# EAGLE board PCB0M8B1 (EAGLE 6.2)
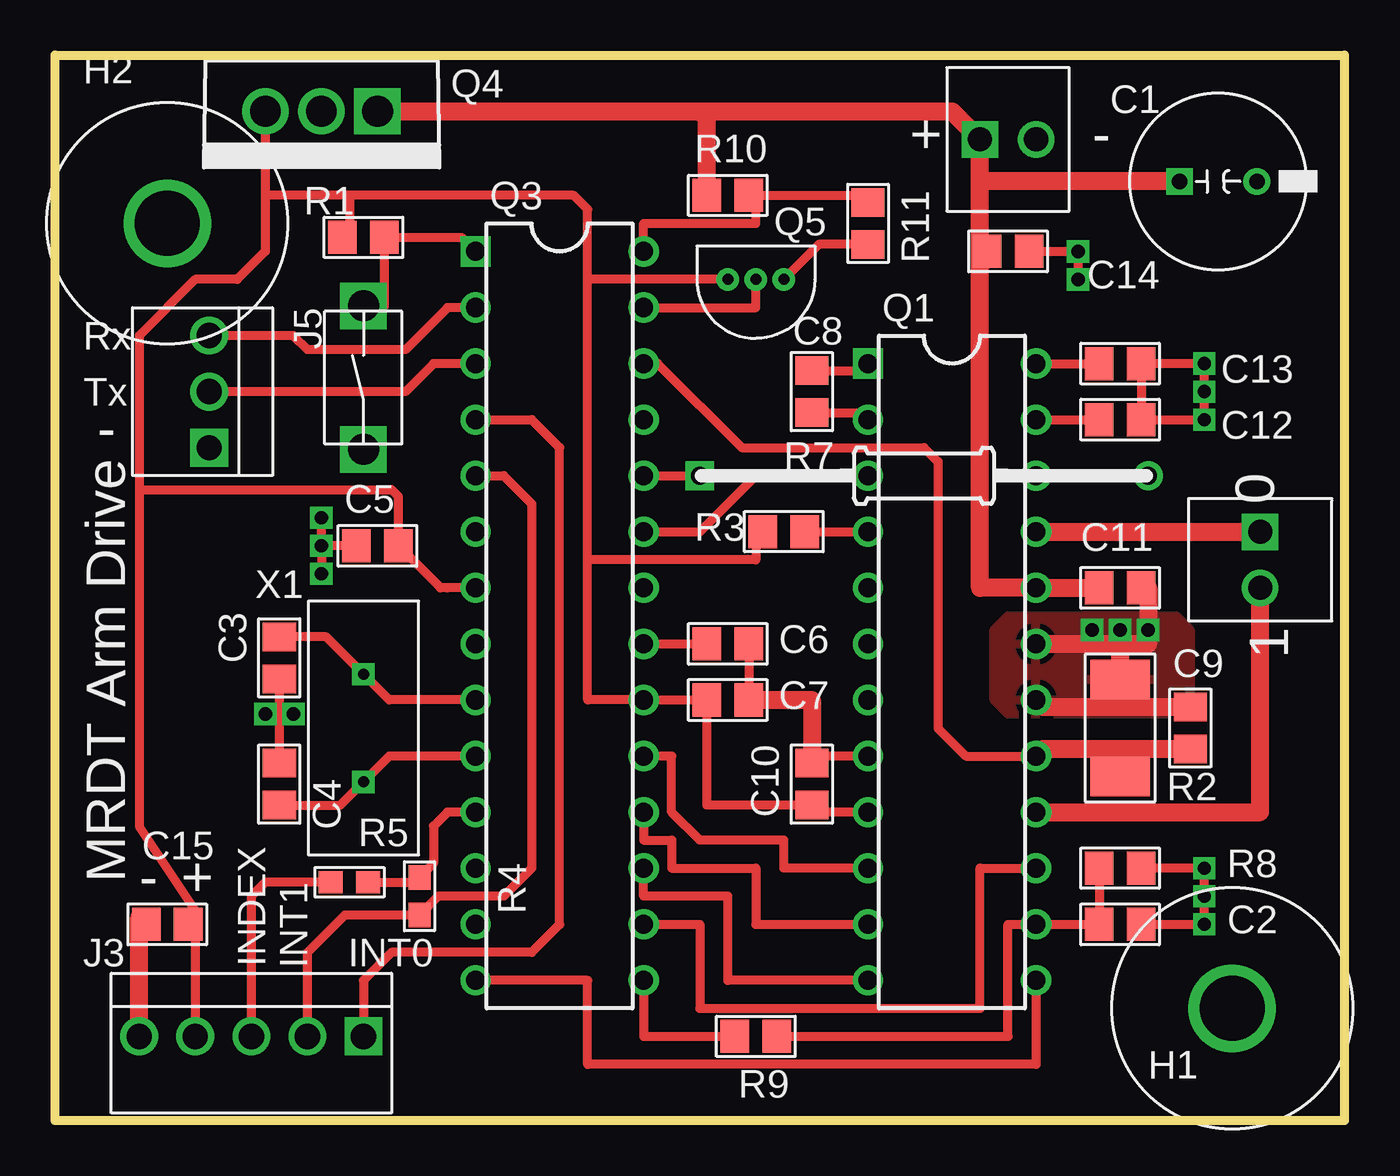
[diagram p0: board, top side]
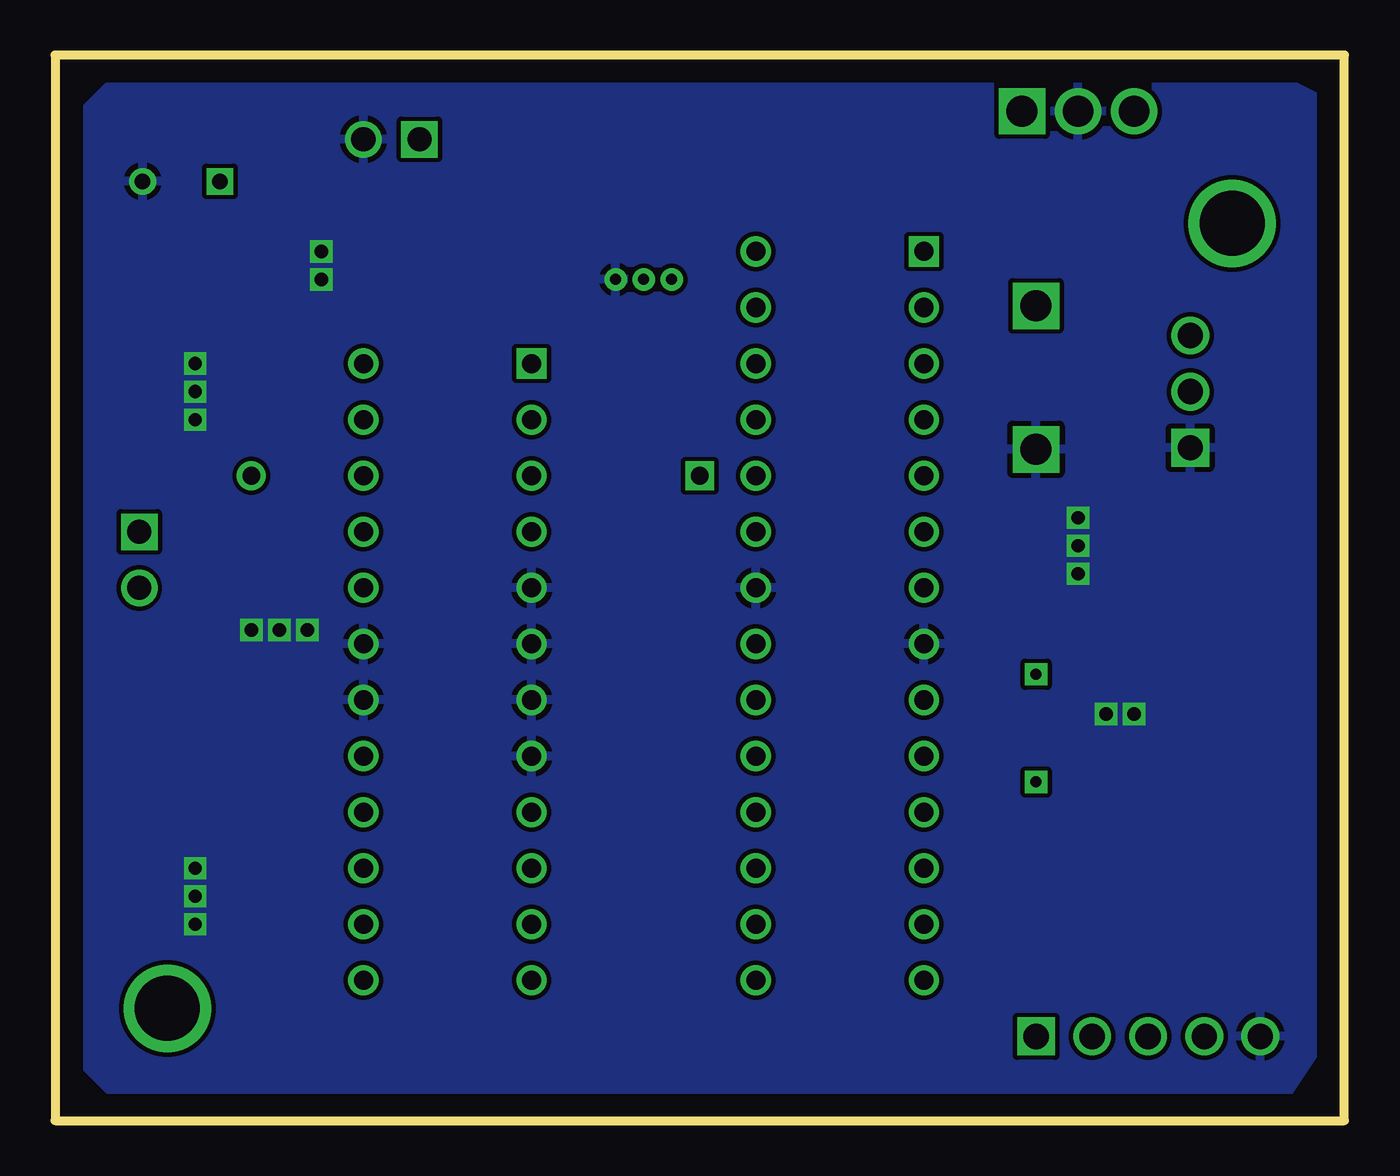
[diagram p1: board, bottom side, seen from below]

Size 58.42 x 48.26 mm. Coordinates in mm from the lower left corner, seen from the top.
Outline: 0,0 0,48.26 58.42,48.26 58.42,0 0,0
Copper layers (1*16): Top 0.035mm / dielectric 1.5mm / Bottom 0.035mm
Design rules: minimum track width 10mil, minimum drill 15mil, track to track 8mil, track to pad 8mil, pad to pad 8mil, via to via 8mil, smd to smd 8mil, copper to edge 40mil, drill to drill 8mil, minimum pad ring 10mil, minimum via ring 8mil, stop-mask expansion 4mil, vias tented up to drill 0mil, thermal gap 10mil

## Footprints (pad centres in the part's own frame; a part is rotated, then mirrored left to right if it is on the bottom)
C_8MM = drill 0.7 square: + -1.75,0 | drill 0.7: - 1.75,0
C_0805 = smd 1.3 x 1.5: 1 -0.95,0; 2 0.95,0
H_MNTHOLE_#4 = drill 2.946: 1 0,0
J_2.54MM = drill 1.1 square: P$1 -1.27,0 | drill 1.1: P$2 1.27,0
J_MTA100_5P = drill 1.143 square: 1 5.08,0 | drill 1.143: 2 2.54,0; 3 0,0; 4 -2.54,0; 5 -5.08,0
J_TOGGLE = drill 1.4 square: P$1 -3.25,0; P$2 3.25,0
J_MTA100_3P = drill 1.143 square: 1 2.54,0 | drill 1.143: 2 0,0; 3 -2.54,0
DIP24 = drill 0.864 square: 1 -16.51,-3.81 | drill 0.864: 2 -13.97,-3.81; 3 -11.43,-3.81; 4 -8.89,-3.81; 5 -6.35,-3.81; 6 -3.81,-3.81; 7 -1.27,-3.81; 8 1.27,-3.81; 9 3.81,-3.81; 10 6.35,-3.81; 11 8.89,-3.81; 12 11.43,-3.81; 13 11.43,3.81; 14 8.89,3.81; 15 6.35,3.81; 16 3.81,3.81; 17 1.27,3.81; 18 -1.27,3.81; 19 -3.81,3.81; 20 -6.35,3.81; 21 -8.89,3.81; 22 -11.43,3.81; 23 -13.97,3.81; 24 -16.51,3.81
DIP28 = drill 0.864 square: 1 -16.51,-3.81 | drill 0.864: 2 -13.97,-3.81; 3 -11.43,-3.81; 4 -8.89,-3.81; 5 -6.35,-3.81; 6 -3.81,-3.81; 7 -1.27,-3.81; 8 1.27,-3.81; 9 3.81,-3.81; 10 6.35,-3.81; 11 8.89,-3.81; 12 11.43,-3.81; 13 13.97,-3.81; 14 16.51,-3.81; 15 16.51,3.81; 16 13.97,3.81; 17 11.43,3.81; 18 8.89,3.81; 19 6.35,3.81; 20 3.81,3.81; 21 1.27,3.81; 22 -1.27,3.81; 23 -3.81,3.81; 24 -6.35,3.81; 25 -8.89,3.81; 26 -11.43,3.81; 27 -13.97,3.81; 28 -16.51,3.81
TO-220 = drill 1.397 square: 1 -2.54,0 | drill 1.397: 2 0,0; 3 2.54,0
TO-92-3 = drill 0.5: 1 1.27,0; 2 0,0; 3 -1.27,0
R_0805 = smd 1.3 x 1.5: 1 -0.95,0; 2 0.95,0
R_2010 = smd 1.8 x 2.7: 1 -2.2,0; 2 2.2,0
R_0603 = smd 1.1 x 1: 1 -0.85,0; 2 0.85,0
R_1/4WL = drill 0.8 square: 1 -10.16,0 | drill 0.8: 2 10.16,0
HC-49 = drill 0.5 square: P$1 -2.44,0; P$2 2.44,0

## Placement (x,y rotation side)
C1  330uF  [C_8MM]  52.7,42.55 0 top
C2  0.1uF  [C_0805]  48.26,8.89 0 top
C3  15pF  [C_0805]  10.16,20.95 90 top
C4  [C_0805]  10.16,15.24 270 top
C5  [C_0805]  14.61,26.04 0 top
C6  [C_0805]  30.48,21.59 0 top
C7  [C_0805]  30.48,19.05 0 top
C8  0.22uF  [C_0805]  34.29,33.02 270 top
C9  [C_0805]  51.44,17.78 90 top
C10  [C_0805]  34.29,15.24 90 top
C11  [C_0805]  48.26,24.13 180 top
C12  [C_0805]  48.26,34.29 180 top
C13  [C_0805]  48.26,31.75 0 top
C14  [C_0805]  43.18,39.37 0 top
C15  [C_0805]  5.08,8.89 180 top
H1  [H_MNTHOLE_#4]  53.34,5.08 0 top
H2  [H_MNTHOLE_#4]  5.08,40.64 0 top
J1  J_1546074-2282834-2  [J_2.54MM]  43.18,44.45 0 top
J2  J_1546074-2282834-2  [J_2.54MM]  54.61,25.4 270 top
J3  [J_MTA100_5P]  8.89,3.81 0 top
J4  J_MC32857  [J_TOGGLE]  13.97,33.66 90 top
J5  [J_MTA100_3P]  6.99,33.02 270 top
Q1  A3959  [DIP24]  40.64,17.78 270 top
Q3  ATMEGA328P  [DIP28]  22.86,22.86 270 top
Q4  LDO  [TO-220]  12.06,45.72 180 top
Q5  LM35  [TO-92-3]  31.75,38.1 0 top
R1  200  [R_0805]  13.97,40.01 180 top
R2  [R_2010]  48.26,17.78 90 top
R3  51k  [R_0805]  33.02,26.67 0 top
R4  [R_0603]  16.51,10.16 90 top
R5  [R_0603]  13.34,10.79 0 top
R7  [R_1/4WL]  39.37,29.21 0 top
R8  10k  [R_0805]  48.26,11.43 0 top
R9  1k  [R_0805]  31.75,3.81 180 top
R10  [R_0805]  30.48,41.91 0 top
R11  [R_0805]  36.83,40.64 270 top
X1  HC49S  [HC-49]  13.97,17.78 90 top

## Library data of the parts
C1 J1 J2 J4 Q1 Q3-Q5 R7 X1 = PCB0M1
C2-C15 R1-R5 R8-R11 = Lib_Passive
H1 H2 J3 J5 = Lib_TH

## Nets
BLANK: Q1.12 Q3.17
D: J5.2 Q3.3
EN: Q1.10 Q3.19
EXTMODE: Q1.15 Q3.16
GND: C1.- C2.2 C3.1 C4.1 C5.1 C6.2 C7.2 C9.2 C10.2 C11.1 C12.1 C13.2 C14.2 C15.2 J1.P$2 J3.5 J4.P$1 J5.1 Q1.5 Q1.6 Q1.7 Q1.8 Q1.18 Q1.19 Q3.8 Q3.22 Q4.2 Q5.1 R2.2 R8.2 R11.2
INTERRUPT1: J3.2 Q3.5 R4.1
INTERRUPT2: J3.1 Q3.4
ISENSE: C9.1 Q1.17 Q3.26 R2.1
N$1: C4.2 Q3.10 X1.P$1
N$2: C3.2 Q3.9 X1.P$2
N$3: Q1.22 R7.2
N$4: Q3.27 Q5.2
N$5: Q3.28 R10.2 R11.1
N$6: C6.1 Q3.21
N$7: J3.3 R5.1
N$8: J4.P$2 Q3.1 R1.1
N$9: C8.1 Q1.1
N$10: C8.2 Q1.2
N$13: Q1.4 R3.2
N$19: C12.2 Q1.24
N$21: C13.1 Q1.23
OUTA: J2.P$2 Q1.16
OUTB: J2.P$1 Q1.21
PFD1: Q1.13 Q3.14
PFD2: Q1.11 Q3.18
PHASE: Q1.3 Q3.23
PULSE: Q3.11 R4.2 R5.2
R: J5.3 Q3.2
REF: C2.1 Q1.14 R8.1 R9.1
REF1: Q3.15 R9.2
SLEEP1: Q3.24 R7.1
V5: C5.2 C7.1 C10.1 C15.1 J3.4 Q1.9 Q3.7 Q3.20 Q4.3 Q5.3 R1.2 R3.1
VIN: C1.+ C11.2 C14.1 J1.P$1 Q1.20 Q4.1 R10.1

## Tracks (layer width: path | path; a pad name or v marks a point on that pad's centre or on a via)
BLANK
  Top 0.406: Q1.12 30.48,6.35 30.48,10.16 26.67,10.16 Q3.17
D
  Top 0.406: Q3.3 17.14,34.29 15.88,33.02 J5.2
EN
  Top 0.406: Q1.10 33.02,11.43 33.02,12.7 29.21,12.7 27.94,13.97 27.94,16.51 Q3.19
EXTMODE
  Top 0.406: Q3.16 29.21,8.89 29.21,5.08 41.91,5.08 41.91,11.43 Q1.15
GND  (via drill 0.6)
  Top 0.406: C6.2 C7.2 | Q1.8 34.29,16.51 C10.2 | C12.1 C13.2 v52.07,31.75 v52.07,33.02 v52.07,34.29 49.53,34.29 | C2.2 v52.07,8.89 v52.07,10.16 v52.07,11.43 R8.2 | R11.2 34.61,39.69 Q5.1 | C5.1 v12.06,26.04 | v12.06,26.04 v12.06,27.3 | v12.06,26.04 v12.06,24.77 | C14.2 v46.35,39.37 v46.35,38.1 | C3.1 10.16,18.41 | v10.79,18.41 10.16,18.41 | v9.53,18.41 10.16,18.41 | 10.16,18.41 C4.1
  Top 0.813: C11.1 49.53,24.13 v49.53,22.23 49.53,21.59 48.26,21.59 | Q1.19 48.26,21.59 | C7.2 34.29,19.05 C10.2 | 3.81,8.57 C15.2 3.81,9.21 J3.5 | R2.2 48.26,21.59 | C9.2 44.77,18.73 Q1.18
  other vias: 46.99,22.23 48.26,22.23
  pour Bottom: 1.27,46.35 2.54,46.99 55.88,46.99 57.15,45.72 57.15,2.54 55.88,1.27 2.54,1.27 1.27,3.17
  pour Top: 48.26,22.86 50.8,22.86 51.44,22.23 51.44,19.05 50.8,18.41 43.18,18.41 42.55,19.05 42.55,22.23 43.18,22.86
INTERRUPT1
  Top 0.406: J3.2 11.43,7.62 13.12,9.31 R4.1 17.36,10.16 20.32,10.16 21.59,11.43 21.59,27.94 20.32,29.21 Q3.5
INTERRUPT2
  Top 0.406: Q3.4 21.59,31.75 22.86,30.48 22.86,8.89 21.59,7.62 15.24,7.62 13.97,6.35 J3.1
ISENSE
  Top 0.406: Q3.26 27.3,34.29 31.11,30.48 39.37,30.48 40.01,29.84 40.01,17.78 41.27,16.51 Q1.17
  Top 0.813: C9.1 48.26,16.83 | 48.26,16.83 44.77,16.83 Q1.17 | R2.1 48.26,16.83
N$1
  Top 0.406: Q3.10 15.14,16.51 X1.P$1 12.92,14.29 C4.2
N$2
  Top 0.406: Q3.9 15.14,19.05 X1.P$2 12.29,21.91 C3.2
N$3
  Top 0.406: R7.2 Q1.22
N$4
  Top 0.406: Q3.27 31.75,36.83 Q5.2
N$5
  Top 0.406: Q3.28 26.67,40.64 31.75,40.64 31.75,41.91 | R10.2 31.75,41.91 | 31.75,41.91 36.51,41.91 R11.1
N$6
  Top 0.406: Q3.21 C6.1
N$7
  Top 0.406: R5.1 9.53,10.79 8.89,10.16 J3.3
N$8
  Top 0.406: J4.P$2 14.92,36.91 R1.1 18.41,40.01 Q3.1
N$9
  Top 0.406: C8.1 36.83,33.97 Q1.1
N$10
  Top 0.406: C8.2 36.83,32.07 Q1.2
N$13
  Top 0.406: R3.2 Q1.4
N$19
  Top 0.406: Q1.24 C12.2
N$21
  Top 0.406: Q1.23 C13.1
OUTA
  Top 0.813: Q1.16 54.61,13.97 J2.P$2
OUTB
  Top 0.813: Q1.21 J2.P$1
PFD1
  Top 0.406: Q1.13 44.45,2.54 24.13,2.54 24.13,6.35 Q3.14
PFD2
  Top 0.406: Q3.18 26.67,12.7 27.94,12.7 27.94,11.43 31.75,11.43 31.75,8.89 Q1.11
PHASE
  Top 0.406: Q3.23 29.21,26.67 31.75,29.21 Q1.3
PULSE
  Top 0.406: Q3.11 17.78,13.97 17.14,13.34 17.14,11.64 R4.2 16.3,10.79 R5.2
R
  Top 0.406: Q3.2 17.78,36.83 15.88,34.92 11.43,34.92 10.79,35.56 J5.3
REF
  Top 0.406: R9.1 43.18,3.81 43.18,8.89 Q1.14 C2.1 R8.1
REF1
  Top 0.406: Q3.15 26.67,3.81 R9.2
SLEEP1
  Top 0.406: Q3.24 R7.1
V5
  Top 0.406: Q1.9 34.29,13.97 C10.1 29.53,14.29 C7.1 Q3.20 24.13,19.05 24.13,25.4 | 24.13,25.4 24.13,38.1 | C15.1 6.35,8.89 | 6.35,8.89 J3.4 | R3.1 31.75,26.67 31.75,25.4 24.13,25.4 | Q5.3 24.13,38.1 | 24.13,38.1 24.13,41.27 23.5,41.91 13.34,41.91 | 6.35,8.89 6.35,9.53 3.81,13.34 3.81,28.57 | 3.81,28.57 15.24,28.57 15.55,28.26 C5.2 17.46,24.13 Q3.7 17.78,24.13 | 13.34,41.91 9.53,41.91 | Q4.3 9.53,41.91 | 9.53,41.91 9.53,39.37 8.26,38.1 6.35,38.1 3.81,35.56 3.81,28.57 | 13.34,41.91 13.34,40.01 R1.2 12.7,40.01
VIN
  Top 0.813: C11.2 Q1.20 41.91,24.13 41.91,38.73 | 41.91,38.73 41.91,39.05 | 41.91,39.05 C14.1 42.23,39.05 41.91,38.73 | 41.91,39.05 41.91,42.55 | 41.91,42.55 J1.P$1 40.64,45.72 29.21,45.72 | Q4.1 29.21,45.72 | R10.1 29.53,45.4 29.21,45.72 | C1.+ 41.91,42.55

## Text on the board
tPlace: + | - | Rx | Tx | - | 0 | 1 | MRDT Arm Drive | INT1 | - | + | INT0 | INDEX